# Altium PCB PCB1.PcbDoc
Units mm, origin at the board's own origin, x right, y up, seen from the top; angles counter-clockwise.
Board outline 70 x 21 mm, 2 copper layers (Top Layer, Bottom Layer); 11 components, 14 nets, 84 pads, 26 vias.
Unrouted connection lines stored in the file: 26.
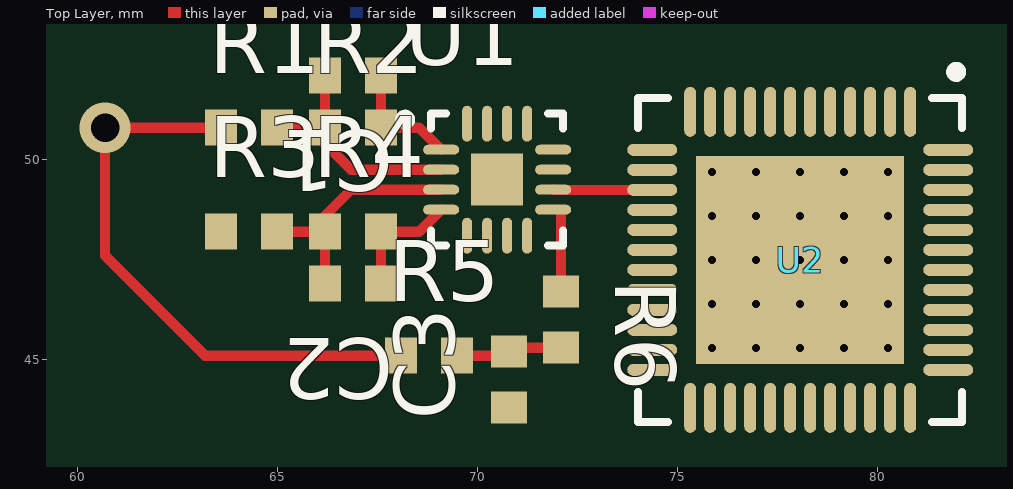
[diagram p0: Top Layer view]
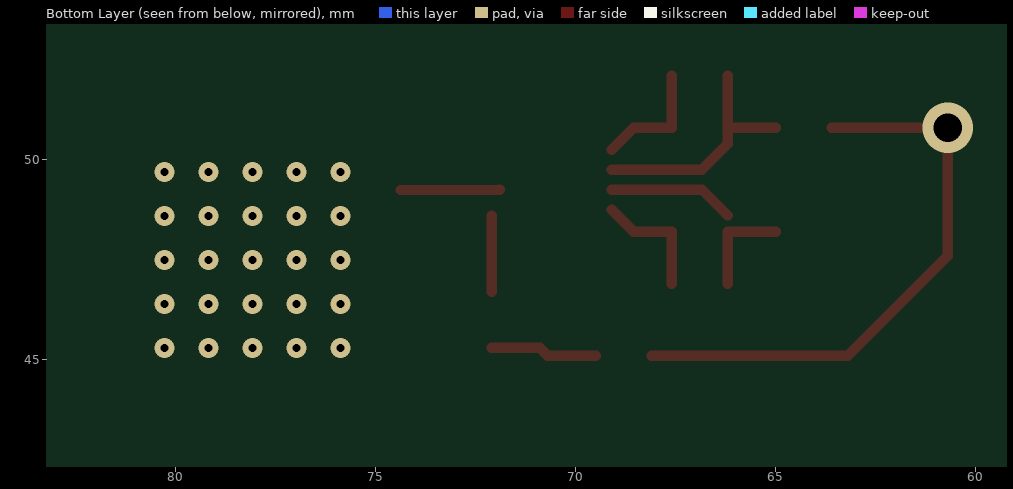
[diagram p1: Bottom Layer view, seen from below]

## Layer stack, top to bottom
Top Solder: solder mask 0.0102, Solder Resist, Dk 3.5
Top Layer: signal copper 0.0356
Dielectric 1: dielectric 0.32, FR-4, Dk 4.8
Bottom Layer: signal copper 0.0356
Bottom Solder: solder mask 0.0102, Solder Resist, Dk 3.5

## Board outline
55,35 55,56 125,56 125,35

## Design rules (kind name [scope] priority, off if disabled: settings)
Clearance [All] p1: gap=0.2
PolygonConnect [All] p1: connectstyle=Relief reliefconductorwidth=0.254 reliefentries=4 polygonreliefangle="90 Angle" airgapwidth=0.254
RoomDefinition Sheet1 [InComponentClass('Sheet1')] p1: confinementstyle=ConfineIn formatcopy=TRUE lockcomponents=FALSE outline 55,35 125,35 125,56 55,56
RoutingVias [All] p1: holewidth=0.711 width=1.27 viastyle="Through Hole" minholewidth=0.711 minwidth=1.27 maxholewidth=0.711 maxwidth=1.27
SolderMaskExpansion [All] p1: expansion=0.102
UnpouredPolygon [All] p1: allowunpoured=FALSE
Width [All] p1: maxlimit=0.254 minlimit=0.254 preferedwidth=0.254
29 further rules are at their usual default settings.

## Components (designator, comment, footprint, x,y, rotation, side; value= is the part's Value field where it differs from the comment)
C1 "1.6u" 1608[0603] 66.9,52.1 r180 top
C2 "1.6u" 1608[0603] 66.9,46.9 r180 top
C3 "0.5u" 1608[0603] 70.8,44.5 r90 top
R1 "1k" 1608[0603] 64.3,50.8 r0 top
R2 "1k" 1608[0603] 66.9,50.8 r0 top
R3 "1k" 1608[0603] 64.3,48.2 r0 top
R4 "1k" 1608[0603] 66.9,48.2 r0 top
R5 "1k" 1608[0603] 68.8,45.1 r0 top
R6 "25k" 1608[0603] 72.1,46 r270 top
U1 "ADA4932-1" QFN50P300X300X100_HS-17N 70.5,49.5 r0 top
U2 "ADS61B49" QFN50P780X780X100_HS-49N 78.077,47.496 r270 top

## Footprints (in the part's own frame and the unit in brackets; to place one, negate y for a bottom-side part, rotate by r counter-clockwise, add the part's x,y. Pads: shape width x height; smd on the part's side, far side on the other; paste and mask are expansions set on the pad)
1608[0603] [mm]
  rect 0.8x0.9 smd: 1(-0.7,0) 2(0.7,0)
  body extent -0.87,-0.48 0.87,0.48, height 1.3
QFN50P300X300X100_HS-17N [mm] "QFN, 16-Leads, Body 3.00x3.00mm, Pitch 0.50mm, Thermal Pad 1.30x1.30mm, IPC Medium Density"
  oval 0.9x0.25 smd: 1(-1.4,0.75) 2(-1.4,0.25) 3(-1.4,-0.25) 4(-1.4,-0.75) 9(1.4,-0.75) 10(1.4,-0.25) 11(1.4,0.25) 12(1.4,0.75)
  oval 0.25x0.9 smd: 5(-0.75,-1.4) 6(-0.25,-1.4) 7(0.25,-1.4) 8(0.75,-1.4) 13(0.75,1.4) 14(0.25,1.4) 15(-0.25,1.4) 16(-0.75,1.4)
  rect 1.3x1.3 smd: 17(0,0)
  silkscreen extent -2.42,-1.65 1.65,1.65, body extent -1.5,-1.5 1.5,1.5, height 1
QFN50P780X780X100_HS-49N [mm] "QFN, 48-Leads, Body 7.80x7.80mm, Pitch 0.50mm, Thermal Pad 5.60x5.60mm, IPC Medium Density"
  oval 1.25x0.3 smd: 1(-3.7,2.75) 2(-3.7,2.25) 3(-3.7,1.75) 4(-3.7,1.25) 5(-3.7,0.75) 6(-3.7,0.25) 7(-3.7,-0.25) 8(-3.7,-0.75) 9(-3.7,-1.25) 10(-3.7,-1.75) 11(-3.7,-2.25) 12(-3.7,-2.75) 25(3.7,-2.75) 26(3.7,-2.25) 27(3.7,-1.75) 28(3.7,-1.25) 29(3.7,-0.75) 30(3.7,-0.25) 31(3.7,0.25) 32(3.7,0.75) 33(3.7,1.25) 34(3.7,1.75) 35(3.7,2.25) 36(3.7,2.75)
  oval 0.3x1.25 smd: 13(-2.75,-3.7) 14(-2.25,-3.7) 15(-1.75,-3.7) 16(-1.25,-3.7) 17(-0.75,-3.7) 18(-0.25,-3.7) 19(0.25,-3.7) 20(0.75,-3.7) 21(1.25,-3.7) 22(1.75,-3.7) 23(2.25,-3.7) 24(2.75,-3.7) 37(2.75,3.7) 38(2.25,3.7) 39(1.75,3.7) 40(1.25,3.7) 41(0.75,3.7) 42(0.25,3.7) 43(-0.25,3.7) 44(-0.75,3.7) 45(-1.25,3.7) 46(-1.75,3.7) 47(-2.25,3.7) 48(-2.75,3.7)
  rect 5.2x5.2 smd: 49(0,0)
  silkscreen extent -4.82,-4.05 4.05,4.05, body extent -3.9,-3.9 3.9,3.9, height 1

## Part data
C1 C2 C3: library part Cap
R1 R2 R3 R4 R5 R6: library part Res

## Via types
v1: diameter 0.5, hole 0.2, Top Layer to Bottom Layer, 25 vias
v2: diameter 1.27, hole 0.711, Top Layer to Bottom Layer, 1 vias

## Nets (pads, with @x,y where several pads share a name; then routed paths per layer and width w, separated by ;. In a path a pad name is that pad's centre, name@x,y a point inside that pad or via, vN(x,y) a via of type N, cw(c..) or ccw(c..) an arc to the next point about the centre after c; other vN are vias at no path point)
+1.8V: U2.2 U2.35
+3.3V: U2.8 U2.18 U2.20 U2.22 U2.24 U2.26
+5V: U1.5 U1.6 U1.7 U1.8 U1.12
-5V: U1.13 U1.14 U1.15 U1.16
GND: C3.1 R3.1 U1.17 U2.1 U2.9 U2.12 U2.13 U2.14 U2.16 U2.17 U2.19 U2.25 U2.36 U2.49
  other v1: 75.877,45.296 76.977,45.296 78.077,45.296 79.177,45.296 80.277,45.296 75.877,46.396 76.977,46.396 78.077,46.396 79.177,46.396 80.277,46.396 75.877,47.496 76.977,47.496 78.077,47.496 79.177,47.496 80.277,47.496 75.877,48.596 76.977,48.596 78.077,48.596 79.177,48.596 80.277,48.596 75.877,49.696 76.977,49.696 78.077,49.696 79.177,49.696 80.277,49.696
NetC1_1: C1.1 R2.2 U1.1 | length 3
  Top Layer w0.254: C1.1 R2.2 68.55,50.8 U1.1
NetC1_2: C1.2 R1.2 R2.1 U1.2 | length 6.1
  Top Layer w0.254: R1.2 R2.1 ; C1.2 R2.1 ; U1.2 66.85,49.75 66.2,50.4 R2.1
NetC2_1: C2.1 R4.2 U1.4 | length 3
  Top Layer w0.254: C2.1 R4.2 68.55,48.2 U1.4
NetC2_2: C2.2 R3.2 R4.1 U1.3 | length 5.7
  Top Layer w0.254: R3.2 R4.1 C2.2 ; R4.1@66.2,48.604 66.846,49.25 U1.3
NetC3_2: C3.2 R5.2 R6.2 | length 2.7
  Top Layer w0.254: R5.2 70.7,45.1 C3.2 70.9,45.3 R6.2
VIN: R1.1 R5.1 | length 14.5
  Top Layer w0.254: R1.1 v2(60.7,50.8) 60.7,47.6 63.2,45.1 R5.1
VOCM: R6.1 U1.9 | length 1.9
  Top Layer w0.254: R6.1 72.1,48.6
VOUT+: U1.11
VOUT-: U1.10 U2.15 | length 2.5
  Top Layer w0.254: U1.10 71.9,49.246 U2.15
pads on no net: U2.3 U2.4 U2.5 U2.6 U2.7 U2.10 U2.11 U2.21 U2.23 U2.27 U2.28 U2.29 U2.30 U2.31 U2.32 U2.33 U2.34 U2.37 U2.38 U2.39 U2.40 U2.41 U2.42 U2.43 U2.44 U2.45 U2.46 U2.47 U2.48